# EAGLE board amp_soha_v3 (EAGLE 6.4)
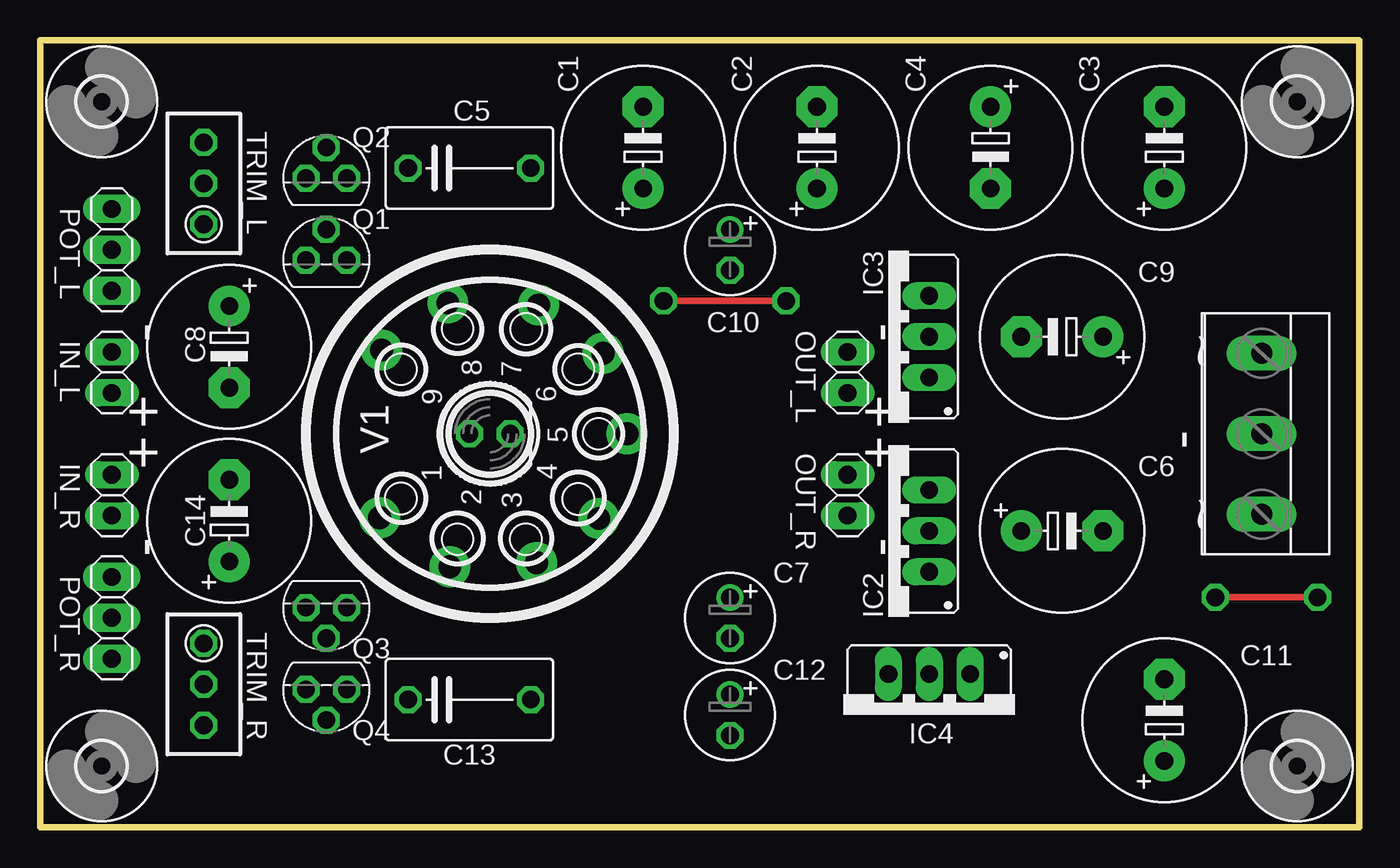
[diagram p0: board, top side]
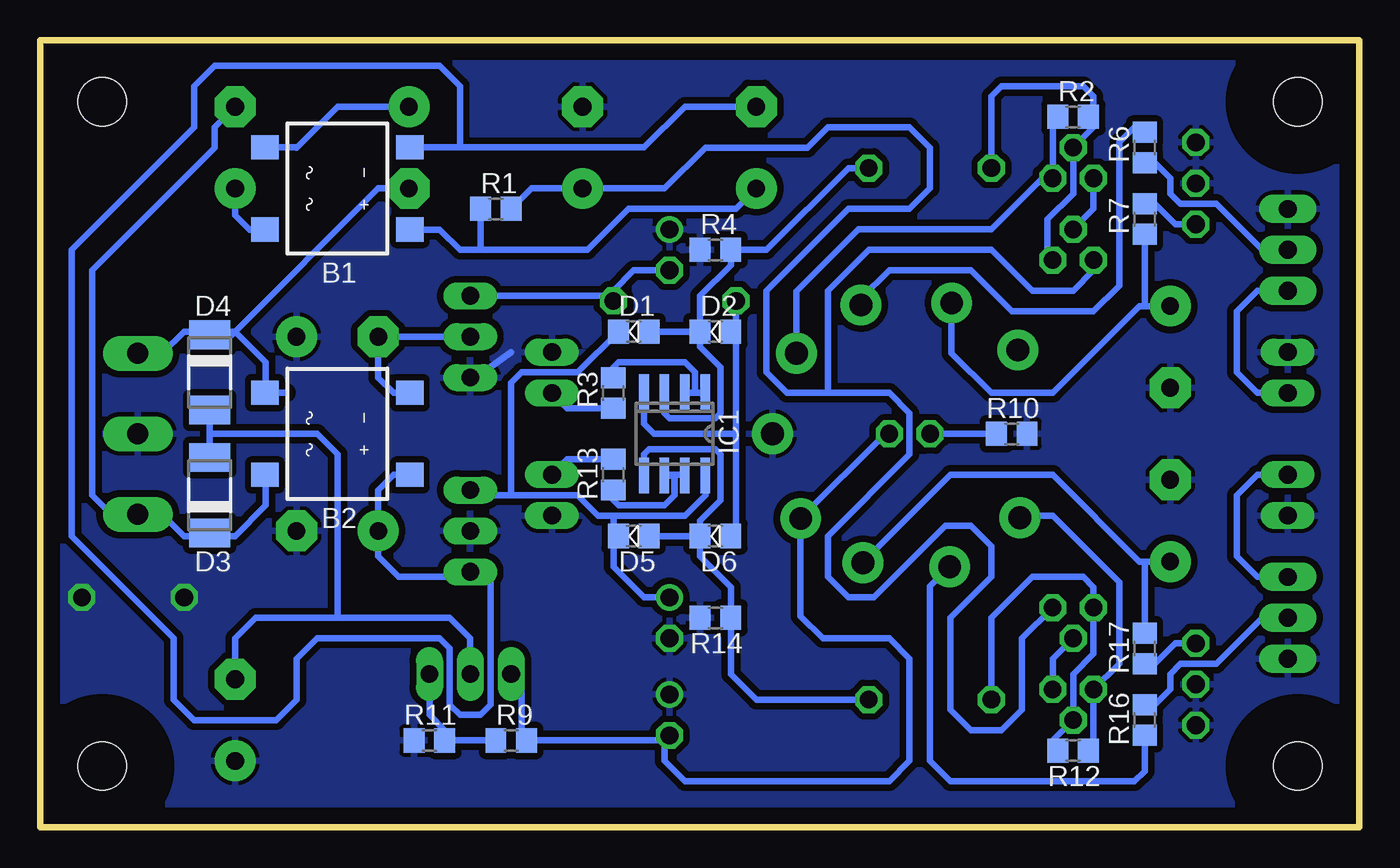
[diagram p1: board, bottom side, seen from below]

Size 81.96 x 48.89 mm. Coordinates in mm from the lower left corner, seen from the top.
Outline: 0,0 0,48.89 81.96,48.89 81.96,0 0,0
Copper layers (1*16): Top 0.035mm / dielectric 1.5mm / Bottom 0.035mm
Design rules "default": minimum track width 10mil, minimum drill 24mil, track to track 8mil, track to pad 8mil, pad to pad 8mil, via to via 8mil, smd to smd 8mil, copper to edge 40mil, drill to drill 8mil, minimum pad ring 10mil, minimum via ring 8mil, stop-mask expansion 4mil, vias tented up to drill 0mil, thermal gap 10mil

## Footprints (pad centres in the part's own frame; a part is rotated, then mirrored left to right if it is on the bottom)
DFS = smd 1.5 x 1.7: + -2.55,-4.5; - 2.55,-4.5; AC1 -2.55,4.5; AC2 2.55,4.5
E5-10,5 = drill 1.1 pad 2.54: + -2.54,0 | drill 1.1 pad 2.54 octagon: - 2.54,0
C075-052X106 = drill 1.1 pad 1.676 octagon: 1 -3.81,0; 2 3.81,0
E2,5-6 = drill 1.1: + -1.27,0 | drill 1.1 pad 1.6 octagon: - 1.27,0
D0805 = smd 1.3 x 1.5: A -0.95,0; K 0.95,0
DO-214AC = smd 1.778 x 2.54: A 2.342,0; C -2.342,0
SO08 = smd 0.6 x 2.2: 1 -1.905,-2.6; 2 -0.635,-2.6; 3 0.635,-2.6; 4 1.905,-2.6; 5 1.905,2.6; 6 0.635,2.6; 7 -0.635,2.6; 8 -1.905,2.6
78XXS = drill 1.1 pad 1.676 long: GND 0,-2.54; IN -2.54,-2.54; OUT 2.54,-2.54
79XXS = drill 1.1 pad 1.676 long: GND -2.54,-2.54; IN 0,-2.54; OUT 2.54,-2.54
337TS = drill 1.1 pad 1.676 long: 1 -2.54,-2.54; 2 0,-2.54; 3 2.54,-2.54
1X02 = drill 1.1 pad 1.676 long: 1 -1.27,0; 2 1.27,0
LED5MM = drill 1.1 pad 1.676 octagon: A -1.27,0; K 1.27,0
1X03 = drill 1.1 pad 1.778 long: 1 -2.54,0; 2 0,0; 3 2.54,0
TO92 = drill 1.1 pad 1.676 octagon: 1 1.27,0; 2 0,1.905; 3 -1.27,0
R0805 = smd 1.3 x 1.5: 1 -0.95,0; 2 0.95,0
RTRIM3296W = drill 1.1 pad 1.676 octagon: 1 0,-2.54; 2 0,0; 3 0,2.54
3,0 = hole 3: 0,0
NOVAL = drill 1.422 pad 2.54: 1 5.207,-6.858; 2 8.254,-2.484; 3 8.004,2.893; 4 5.258,6.77; 5 0,8.524; 6 -5.004,7.024; 7 -8.004,3.02; 8 -8.127,-2.611; 9 -5.207,-6.731
W237-103 = drill 1.3 pad 2.184 long: 1 -5,-1.29; 2 0,-1.29; 3 5,-1.29

## Placement (x,y rotation side)
B1  DF01S  [DFS]  63.5,39.69 90 bottom
B2  DF01S  [DFS]  63.5,24.45 90 bottom
C1  100uF/100V  [E5-10,5]  37.47,42.23 90 top
C2  100uF/100V  [E5-10,5]  48.26,42.23 90 top
C3  100uF/100V  [E5-10,5]  69.85,42.23 90 top
C4  100uF/100V  [E5-10,5]  59.05,42.23 270 top
C5  1uF/100V  [C075-052X106]  26.67,40.96 0 top
C6  470uF/35V  [E5-10,5]  63.5,18.41 0 top
C7  47uF/16V  [E2,5-6]  42.86,13.02 270 top
C8  1000uF/10V  [E5-10,5]  11.75,29.84 270 top
C9  470uF/35V  [E5-10,5]  63.5,30.48 180 top
C10  47uF/16V  [E2,5-6]  42.86,35.88 270 top
C11  470uF/35V  [E5-10,5]  69.85,6.67 90 top
C12  47uF/16V  [E2,5-6]  42.86,6.99 270 top
C13  1uF/100V  [C075-052X106]  26.67,7.94 0 top
C14  1000uF/10V  [E5-10,5]  11.75,19.05 90 top
D1  1N4148  [D0805]  45.09,30.8 180 bottom
D2  1N4148  [D0805]  40.01,30.8 180 bottom
D3  ES1  [DO-214AC]  71.44,20.64 90 bottom
D4  ES1  [DO-214AC]  71.44,28.26 270 bottom
D5  1N4148  [D0805]  45.09,18.1 180 bottom
D6  1N4148  [D0805]  40.01,18.1 180 bottom
IC1  NE5532  [SO08]  42.55,24.45 180 bottom
IC2  7812  [78XXS]  52.7,18.41 90 top
IC3  7912  [79XXS]  52.7,30.48 90 top
IC4  [337TS]  55.24,6.99 180 top
IN_L  [1X02]  4.45,28.26 90 top
IN_R  [1X02]  4.45,20.64 270 top
LED1  [LED5MM]  27.94,24.45 0 top
OUT_L  [1X02]  50.16,28.26 90 top
OUT_R  [1X02]  50.16,20.64 270 top
POT_L  100k  [1X03]  4.45,35.88 270 top
POT_R  100k  [1X03]  4.45,13.02 90 top
Q1  J113  [TO92]  17.78,35.24 0 top
Q2  J113  [TO92]  17.78,40.32 0 top
Q3  J113  [TO92]  17.78,13.65 180 top
Q4  J113  [TO92]  17.78,8.57 180 top
R1  2k2  [R0805]  53.66,38.42 180 bottom
R2  1k5  [R0805]  17.78,44.13 180 bottom
R3  150  [R0805]  46.36,26.99 270 bottom
R4  100k  [R0805]  40.01,35.88 180 bottom
R6  300  [R0805]  13.34,42.23 270 bottom
R7  560  [R0805]  13.34,37.78 90 bottom
R9  1k3  [R0805]  52.7,5.4 0 bottom
R10  1k  [R0805]  21.59,24.45 180 bottom
R11  11k  [R0805]  57.79,5.4 0 bottom
R12  1k5  [R0805]  17.78,4.76 0 bottom
R13  150  [R0805]  46.36,21.91 90 bottom
R14  100k  [R0805]  40.01,13.02 180 bottom
R16  300  [R0805]  13.34,6.67 90 bottom
R17  560  [R0805]  13.34,11.11 270 bottom
TRIM_L  2k  [RTRIM3296W]  10.16,40.01 0 top
TRIM_R  2k  [RTRIM3296W]  10.16,8.89 180 top
U$1  [3,0]  3.81,3.81 0 top
U$2  [3,0]  3.81,45.09 0 top
U$3  [3,0]  78.1,3.81 0 top
U$4  [3,0]  78.1,45.09 0 top
V1  [NOVAL]  27.94,24.45 270 top
X1  [W237-103]  74.61,24.45 90 top

## Library data of the parts
B1 B2 C1-C14 D1-D6 IC1-IC4 IN_L IN_R LED1 OUT_L OUT_R POT_L POT_R Q1-Q4 R1-R4 R6 R7 R9-R14 R16 R17 TRIM_L TRIM_R U$1-U$4 V1 X1 = amp_soha

## Nets
+12V: C7.+ D1.K D5.K IC1.8 IC2.OUT
+24V: C2.+ Q1.3 Q3.3 R1.1
-12.6V: C12.- IC4.3 LED1.K R9.2 V1.4
-12V: C10.- D2.A D6.A IC1.4 IC3.OUT
AGND: C2.- C6.- C7.- C8.- C9.+ C10.+ C11.+ C12.+ C14.- IC2.GND IC3.GND IN_L.2 IN_R.2 OUT_L.2 OUT_R.2 POT_L.1 POT_R.1 R4.2 R10.1 R11.1 R14.2 TRIM_L.2 TRIM_L.3 TRIM_R.2 TRIM_R.3 V1.5 X1.2
N$1: B2.AC1 C3.- D3.C X1.1
N$2: B2.AC2 C4.- D4.C X1.3
N$3: C11.- D3.A D4.A IC4.2
N$4: IC4.1 R9.1 R11.2
N$5: B2.- C9.- IC3.IN
N$6: B1.- B2.+ C1.- C6.+ IC2.IN
N$7: LED1.A R10.2
N$8: B1.AC1 C3.+
N$9: B1.AC2 C4.+
N$10: R16.1 V1.2
N$11: B1.+ C1.+ R1.2
N$12: IN_L.1 POT_L.3
N$13: POT_L.2 R6.2
N$14: R6.1 V1.7
N$15: C8.+ R7.1 V1.8
N$16: C5.1 Q1.1 Q2.2 R2.1
N$17: R7.2 TRIM_L.1
N$18: R17.2 TRIM_R.1
N$19: Q2.1 R2.2 V1.6
N$20: Q1.2 Q2.3
N$21: Q4.1 R12.2 V1.1
N$22: C5.2 D1.A D2.K IC1.3 R4.1
N$24: IC1.1 IC1.2 R3.1
N$25: OUT_L.1 R3.2
N$26: IN_R.1 POT_R.3
N$27: POT_R.2 R16.2
N$29: C14.+ R17.1 V1.3
N$32: C13.1 Q3.1 Q4.2 R12.1
N$33: Q3.2 Q4.3
N$34: C13.2 D5.A D6.K IC1.5 R14.1
N$35: IC1.6 IC1.7 R13.1
N$36: OUT_R.1 R13.2

## Tracks (layer width: path | path; a pad name or v marks a point on that pad's centre or on a via)
+12V
  Bottom 0.254: 46.36,17.78 D5.K
  Bottom 0.406: D5.K 46.36,18.41 | 46.36,19.37 41.91,19.37 40.64,20.64 IC1.8 | 46.36,18.41 46.36,17.78 46.36,16.19 44.45,14.29 C7.+ | 46.36,18.41 46.36,19.37 | 52.7,20.64 48.58,20.64 47.31,19.37 46.36,19.37 | 52.7,20.64 52.7,27.62 52.07,28.26 48.58,28.26 D1.K | 52.7,20.64 54.93,20.64 IC2.OUT
+24V
  Bottom 0.406: R1.1 51.44,39.69 C2.+ 43.18,39.69 40.64,42.23 34.29,42.23 33.02,43.5 27.94,43.5 26.67,42.23 26.67,39.69 27.94,38.42 31.75,38.42 36.83,33.34 36.83,28.26 35.56,26.99 33.02,26.99 | 33.02,26.99 29.21,26.99 27.94,25.72 27.94,23.18 33.02,18.1 33.02,15.56 31.75,14.29 30.16,14.29 25.72,18.73 24.13,18.73 22.86,17.46 22.86,15.56 25.4,13.02 25.4,7.3 24.13,6.03 22.23,6.03 20.96,7.3 20.96,11.75 Q3.3 | Q1.3 16.51,34.61 17.78,33.34 20.32,33.34 22.86,35.88 30.48,35.88 33.02,33.34 33.02,26.99
-12.6V
  Bottom 0.406: LED1.K 29.45,24.45 V1.4 34.71,13.12 33.34,11.75 29.21,11.75 27.94,10.48 27.94,4.13 29.21,2.86 41.91,2.86 43.18,4.13 43.18,5.4 | IC4.3 52.07,8.89 52.07,5.72 R9.2 43.18,5.4 | 43.18,5.4 42.86,5.4 C12.- 43.18,5.4
-12V  (via drill 1.1 pad 1.68)
  Top 0.406: v38.73,32.7 v46.36,32.7
  Bottom 0.406: D6.A 38.73,18.1 38.73,24.45 | 38.73,24.45 38.73,30.48 | 38.73,30.48 D2.A 38.73,31.12 | IC1.4 44.45,25.08 43.81,24.45 38.73,24.45 | 38.73,30.48 v38.73,32.7 | C10.- 45.09,34.61 46.36,33.34 v46.36,32.7 46.67,33.02 IC3.OUT
AGND  (via drill 1.1 pad 1.68)
  Top 0.406: v73.02,14.29 v79.38,14.29
  Bottom 0.406: IC3.GND 54.93,27.94 52.7,29.53
  pour Bottom (isolate 0.406): -1.27,-0.95 -1.27,49.85 83.18,49.85 83.18,-0.95
N$1
  Bottom 0.406: D3.C 71.95,18.1 73.02,18.1 74.38,19.45 X1.1 77.55,19.45 78.74,20.64 78.74,34.61 71.12,42.23 71.12,43.5 C3.- | D3.C 70.68,18.29 70.48,18.1 | B2.AC1 67.94,21.95 67.94,20 69.85,18.1 70.6,18.1 D3.C
N$2
  Bottom 0.406: 70.48,30.8 71.75,30.8 D4.C | 66.68,27 B2.AC2 67.94,26.94 67.94,28.89 69.85,30.8 70.6,30.8 D4.C | C4.- 60.96,39.69 70.05,30.6 D4.C | X1.3 74.38,29.45 73.02,30.8 71.95,30.8 D4.C
N$3
  Bottom 0.406: 71.44,24.45 D3.A | D4.A 71.44,24.45 | 71.44,24.45 64.77,24.45 63.5,23.18 63.5,13.02 | 63.5,13.02 68.58,13.02 69.85,11.75 C11.- | IC4.2 55.24,11.75 56.52,13.02 63.5,13.02
N$4
  Bottom 0.406: R9.1 R11.2 56.83,6.03 57.79,6.99 IC4.1
N$5
  Bottom 0.406: IC3.IN C9.- 60.96,27.94 60.02,27 B2.-
N$6
  Bottom 0.406: B2.+ 60.02,21.9 60.96,20.95 C6.+ 60.96,16.83 59.69,15.56 55.24,15.56 | B1.- 55.88,42.24 | 55.88,42.24 44.44,42.24 41.91,44.77 C1.- | 55.88,42.24 55.88,46.04 57.15,47.31 71.12,47.31 72.39,46.04 72.39,43.5 80.01,35.88 80.01,18.1 73.66,11.75 73.66,7.94 72.39,6.67 67.31,6.67 66.04,7.94 66.04,10.48 64.77,11.75 57.15,11.75 56.52,11.11 56.52,7.62 55.88,6.99 54.61,6.99 53.98,7.62 53.98,15.56 55.24,15.56 | IC2.IN 55.24,15.56
N$7
  Bottom 0.406: LED1.A R10.2
N$8
  Bottom 0.406: C3.+ 69.85,38.03 68.95,37.14 B1.AC1
N$9
  Bottom 0.406: C4.+ 63.5,44.77 66.04,42.23 66.05,42.24 B1.AC2
N$10
  Bottom 0.406: V1.2 26.67,14.98 26.67,4.13 25.4,2.86 13.97,2.86 13.34,3.49 R16.1
N$11
  Bottom 0.406: B1.+ 57.14,37.14 55.88,35.88 54.61,35.88 | 54.61,35.88 47.94,35.88 45.4,38.42 38.73,38.42 C1.+ | R1.2 54.61,35.88
N$12
  Bottom 0.406: IN_L.1 6.35,26.99 7.62,28.26 7.62,32.07 6.35,33.34 POT_L.3
N$13
  Bottom 0.406: POT_L.2 6.03,35.88 8.89,38.74 11.11,38.74 11.75,39.37 11.75,40.32 12.7,41.28 R6.2
N$14
  Bottom 0.406: V1.7 30.96,32.86 29.21,34.61 24.13,34.61 21.59,32.07 16.51,32.07 14.92,33.66 14.92,42.55 13.97,43.5 13.66,43.5 R6.1
N$15
  Bottom 0.406: V1.8 25.33,29.46 22.86,26.99 19.05,26.99 13.65,32.38 13.34,32.38 | C8.+ 13.34,32.38 | R7.1 13.34,32.38
N$16
  Bottom 0.406: Q1.1 19.37,35.56 19.37,37.78 17.78,39.37 Q2.2 16.51,43.5 16.51,44.13 R2.1 16.51,44.45 16.51,45.4 17.14,46.04 22.23,46.04 22.86,45.4 C5.1
N$17
  Bottom 0.406: R7.2 12.7,38.73 11.43,37.46 TRIM_L.1
N$18
  Bottom 0.406: TRIM_R.1 11.43,11.43 12.7,10.16 R17.2
N$19
  Bottom 0.406: V1.6 34.96,33.3 31.12,37.15 22.86,37.15 19.69,40.32 Q2.1 19.05,43.81 R2.2
N$20
  Bottom 0.406: Q2.3 16.51,38.42 Q1.2
N$21
  Bottom 0.406: R12.2 16.51,4.76 Q4.1 14.92,10.16 14.92,15.24 19.05,19.37 20.96,19.37 V1.1
N$22
  Bottom 0.254: 43.18,27.62 IC1.3
  Bottom 0.406: 43.18,27.62 43.18,25.72 42.86,25.4 40.01,25.4 39.69,25.72 39.69,28.57 40.95,29.84 D2.K | 41.27,30.48 D2.K | D1.A D2.K | C5.2 31.75,40.96 36.83,35.88 R4.1 39.05,34.92 40.96,33.02 D2.K
N$24
  Bottom 0.406: 41.27,26.99 41.27,28.26 41.91,28.89 46.04,28.89 46.36,28.57 R3.1 | IC1.2 arc-90 41.85,26.99 41.27,26.99 | 41.27,26.99 40.7,26.99 arc-90 IC1.1
N$25
  Bottom 0.406: R3.2 49.22,26.04 OUT_L.1
N$26
  Bottom 0.406: IN_R.1 6.35,21.91 7.62,20.64 7.62,16.83 6.35,15.56 POT_R.3
N$27
  Bottom 0.406: POT_R.2 6.03,13.02 8.89,10.16 11.11,10.16 11.75,9.52 11.75,8.57 12.7,7.62 R16.2 13.02,7.62
N$29
  Bottom 0.406: V1.3 30.83,16.47 25.4,21.91 19.05,21.91 13.65,16.51 13.34,16.51 | 13.34,16.51 C14.+ | R17.1 13.34,16.51
N$32
  Bottom 0.406: R12.1 19.05,4.76 19.05,5.4 Q4.2 17.78,9.52 16.51,10.8 Q3.1 16.51,14.92 17.14,15.56 20.32,15.56 22.86,13.02 C13.1
N$33
  Bottom 0.406: Q4.3 19.05,10.48 Q3.2
N$34
  Bottom 0.406: IC1.5 44.45,23.18 44.13,23.5 40.01,23.5 39.69,23.18 39.69,20.32 40.96,19.05 D6.K | C13.2 37.47,7.94 39.05,9.53 R14.1 39.05,14.92 40.96,16.83 D6.K | D5.A D6.K | 41.27,18.1 D6.K
N$35
  Bottom 0.254: 41.91,21.27 IC1.7 | 43.18,21.27 IC1.6
  Bottom 0.406: 42.55,21.91 42.55,20.64 43.18,20 46.04,20 46.36,20.32 R13.1 | 42.55,21.91 43.12,21.91 IC1.6 42.61,21.85 42.55,21.91 | 42.55,21.91 41.97,21.91 IC1.7
N$36
  Bottom 0.406: R13.2 49.22,22.86 OUT_R.1

## Text on the board
tPlace: - | - | ~ | + | + | - | + | + | ~ | - | -